# EAGLE board LoRa_1W_Breakout-Panel (EAGLE 9.6.2), part 1 of 2
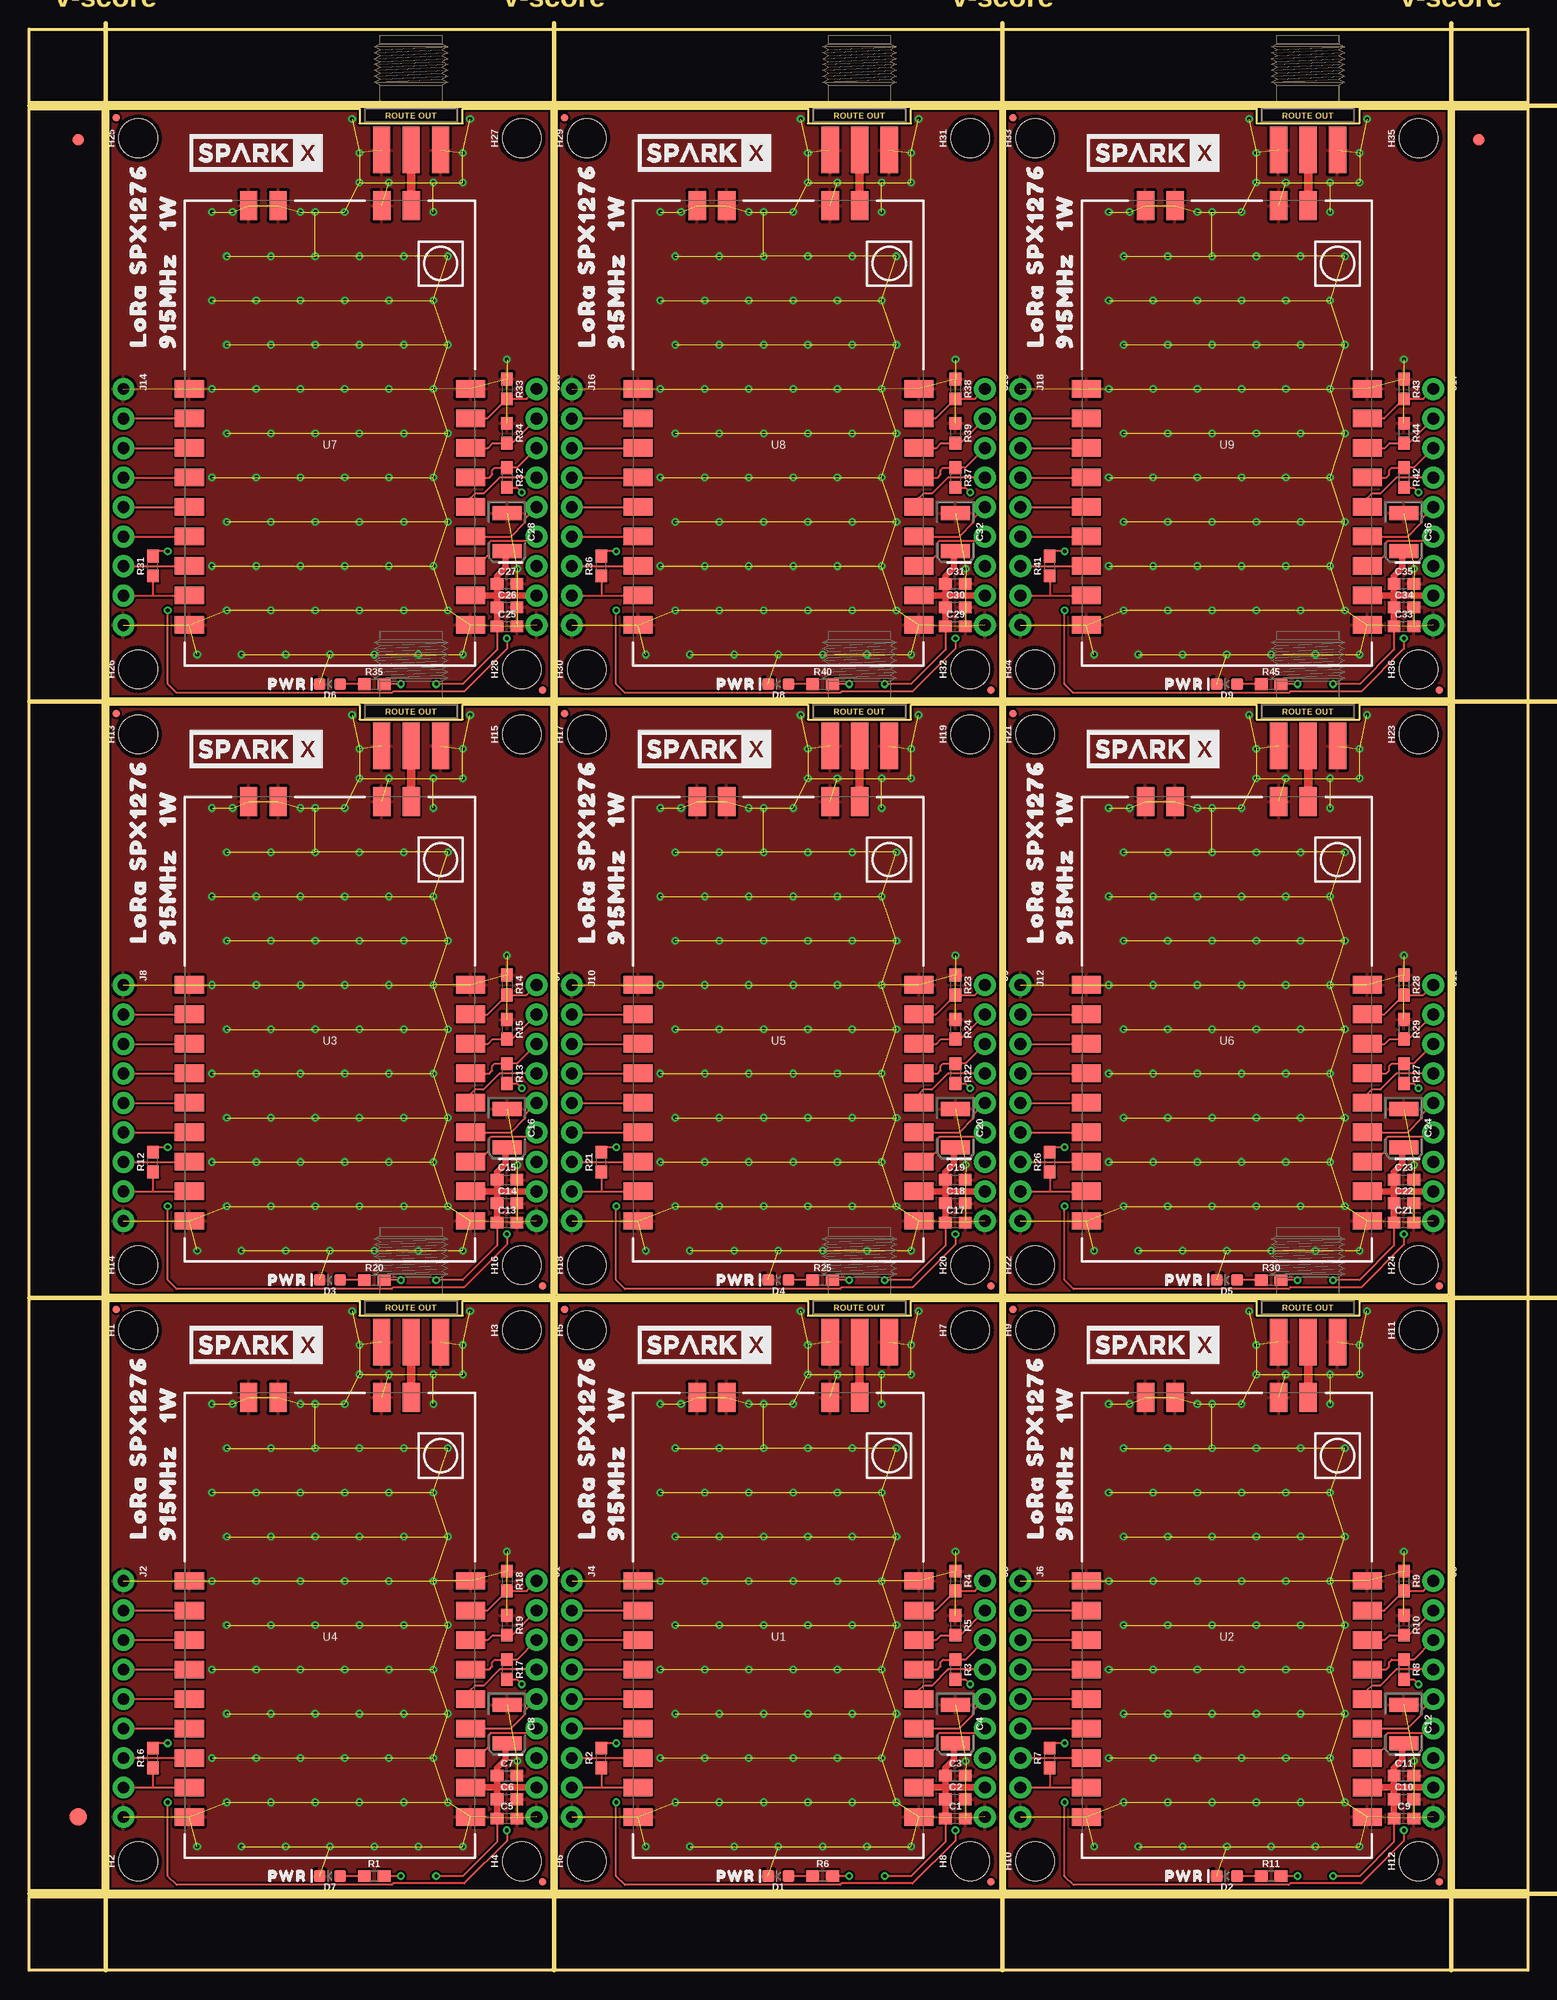
[diagram p0: board, top side]
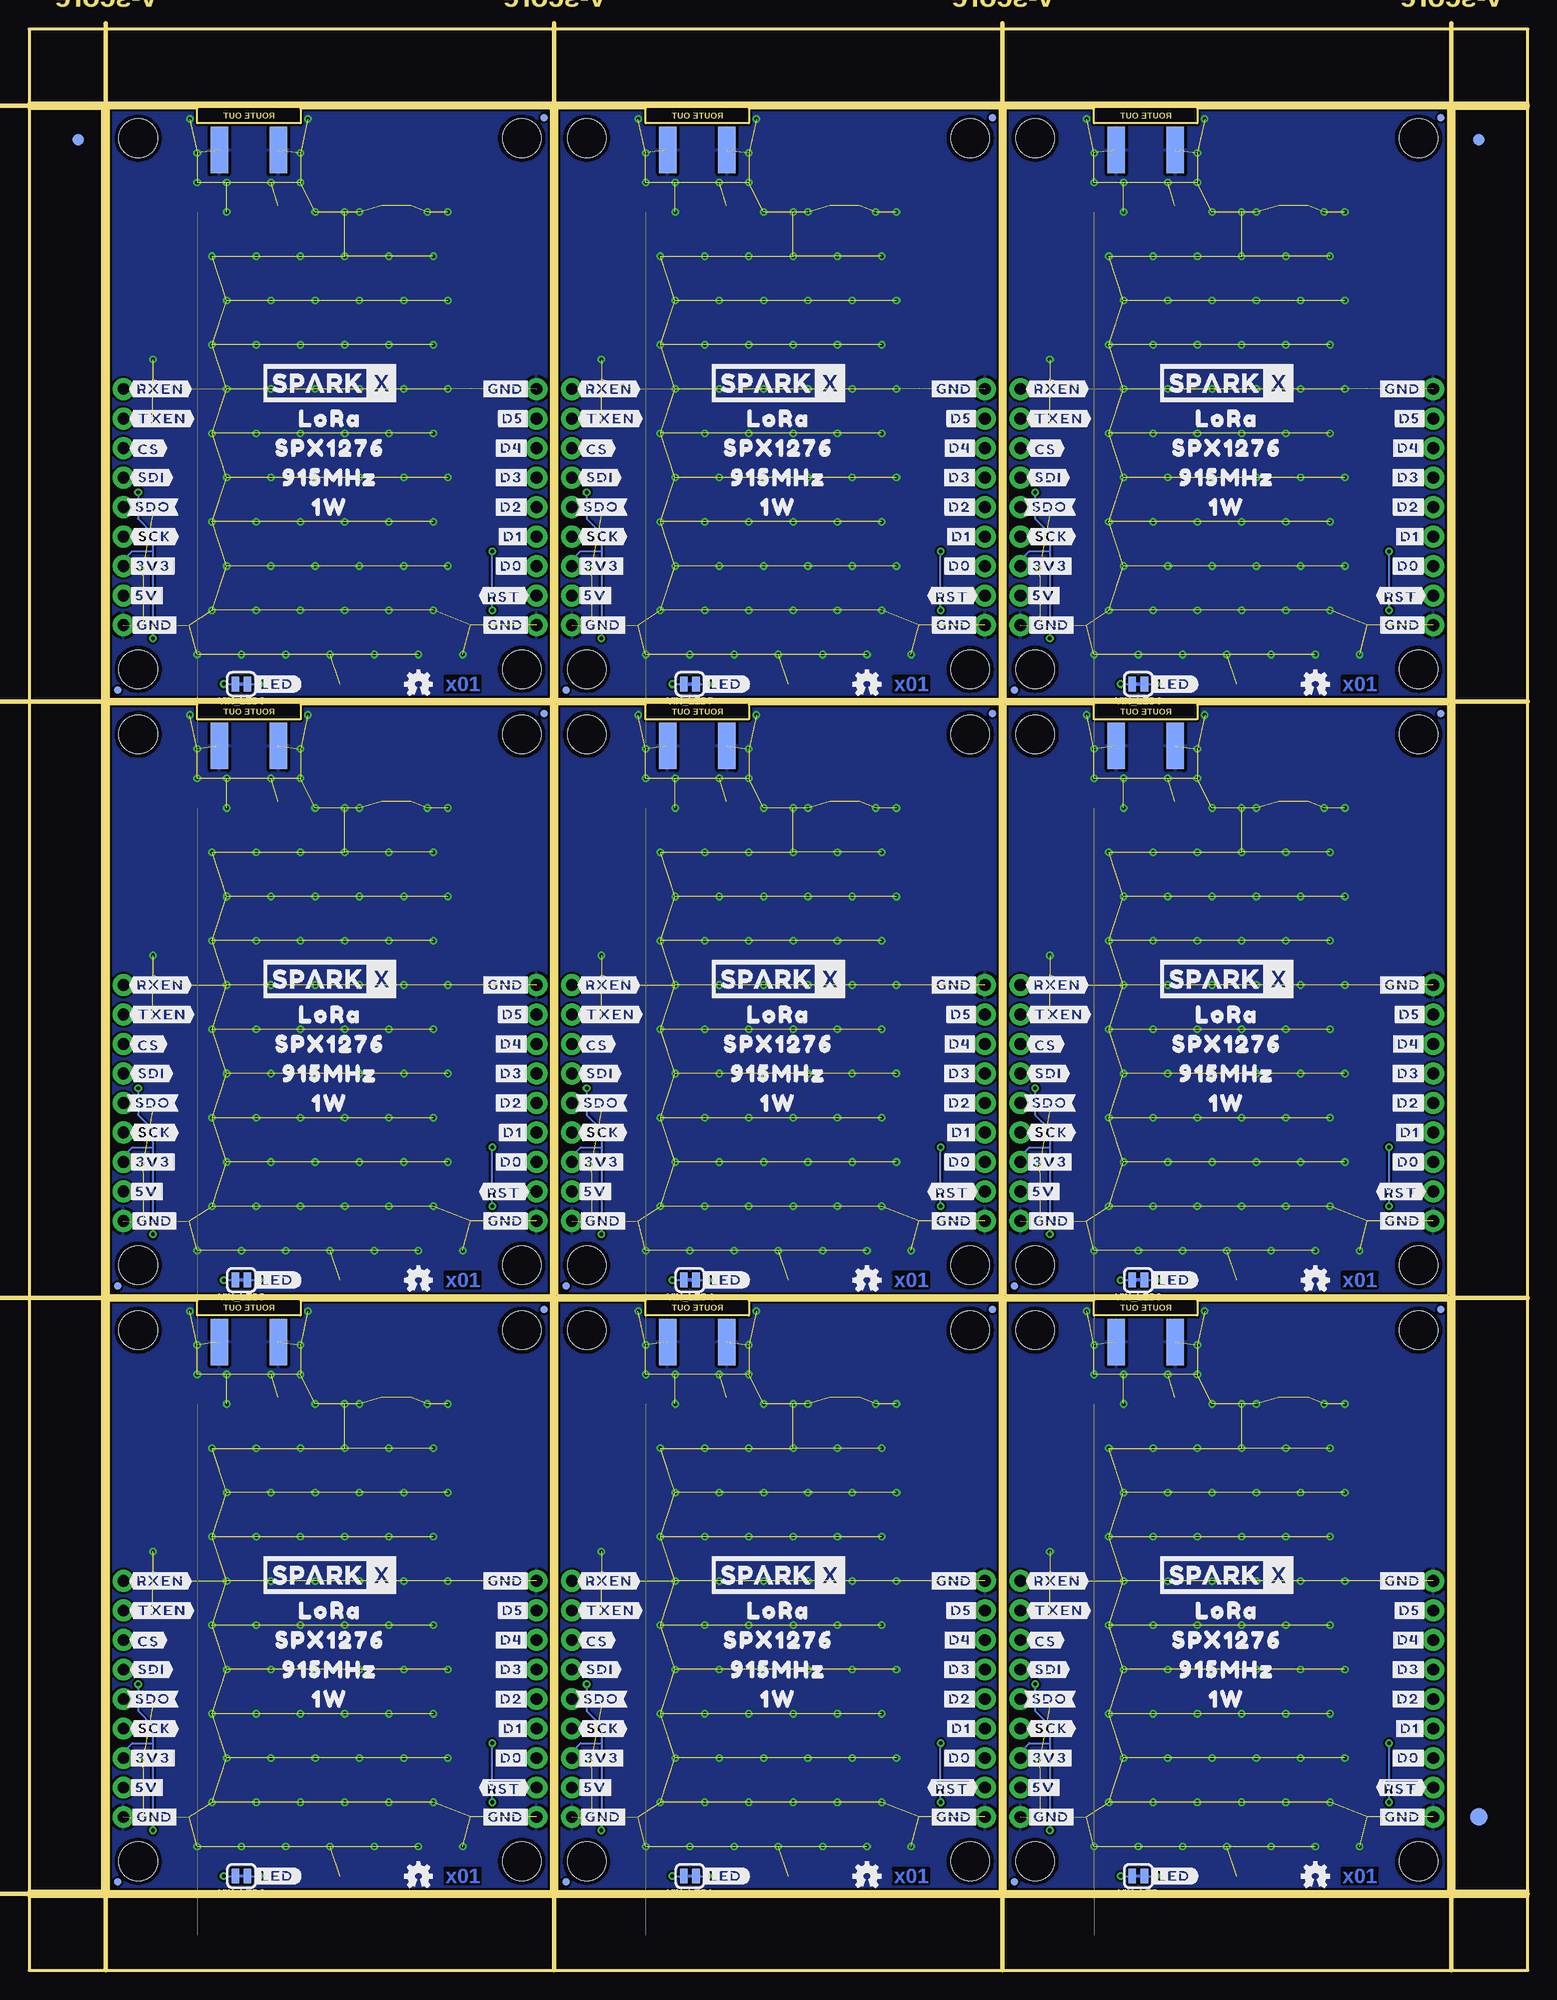
[diagram p1: board, bottom side, seen from below]

Size 129.03 x 167.13 mm. Coordinates in mm from the lower left corner, seen from the top.
Outline: 44.96,6.86 6.86,6.86 6.86,57.66 28.45,57.66 28.45,56.39 37.34,56.39 37.34,57.66 44.96,57.66 44.96,6.86
Outline: 83.57,6.86 45.47,6.86 45.47,57.66 67.06,57.66 67.06,56.39 75.95,56.39 75.95,57.66 83.57,57.66 83.57,6.86
Outline: 122.17,6.86 84.07,6.86 84.07,57.66 105.66,57.66 105.66,56.39 114.55,56.39 114.55,57.66 122.17,57.66 122.17,6.86
Outline: 44.96,58.17 6.86,58.17 6.86,108.97 28.45,108.97 28.45,107.7 37.34,107.7 37.34,108.97 44.96,108.97 44.96,58.17
Outline: 83.57,58.17 45.47,58.17 45.47,108.97 67.06,108.97 67.06,107.7 75.95,107.7 75.95,108.97 83.57,108.97 83.57,58.17
Outline: 122.17,58.17 84.07,58.17 84.07,108.97 105.66,108.97 105.66,107.7 114.55,107.7 114.55,108.97 122.17,108.97 122.17,58.17
Outline: 44.96,109.47 6.86,109.47 6.86,160.27 28.45,160.27 28.45,159 37.34,159 37.34,160.27 44.96,160.27 44.96,109.47
Outline: 83.57,109.47 45.47,109.47 45.47,160.27 67.06,160.27 67.06,159 75.95,159 75.95,160.27 83.57,160.27 83.57,109.47
Outline: 122.17,109.47 84.07,109.47 84.07,160.27 105.66,160.27 105.66,159 114.55,159 114.55,160.27 122.17,160.27 122.17,109.47
Outline: 0,6.35 129.03,6.35 129.03,0 0,0 0,6.35
Outline: 122.68,160.27 129.03,160.27 129.03,6.86 122.68,6.86 122.68,160.27
Outline: 0,167.13 129.03,167.13 129.03,160.78 0,160.78 0,167.13
Outline: 0,160.27 6.35,160.27 6.35,6.86 0,6.86 0,160.27
Copper layers (1*16): Top 0.035mm / dielectric 1.5mm / Bottom 0.035mm
Design rules "LoRa_1W_Breakout": minimum track width 7mil, minimum drill 12mil, track to track 7mil, track to pad 7mil, pad to pad 7mil, via to via 7mil, smd to smd 7mil, copper to edge 7mil, drill to drill 7mil, minimum pad ring 7mil, minimum via ring 7mil, stop-mask expansion 4mil, vias tented up to drill 25mil, thermal gap 10mil
Net classes: 0 default: width 0 mm, drill 0 mm
Milling: 8 lines

## Footprints (pad centres in the part's own frame; a part is rotated, then mirrored left to right if it is on the bottom)
0603 = smd 1.1 x 1: 1 -0.85,0; 2 0.85,0
EIA3528 = smd 1.2 x 2.5: A 1.65,0; C -1.65,0
LED-0603 = smd 1 x 1: A -0.877,0; C 0.877,0
SMA-EDGE = smd 1.5 x 4: GND@0 -2.54,0; GND@1 2.54,0; SIG 0,0 | smd 1.5 x 4 bottom: GND@2 -2.54,0; GND@3 2.54,0
FIDUCIAL-1X2 = smd 1 x 1: 1 0,0
FIDUCIAL-1.5X3 = smd 1.5 x 1.5: 1 0,0
FIDUCIAL-MICRO = smd 0.635 x 0.635: 1 0,0
STAND-OFF = hole 3.302: 0,0
1X09_NO_SILK = drill 1.016 pad 1.88: 1 0,0; 2 2.54,0; 3 5.08,0; 4 7.62,0; 5 10.16,0; 6 12.7,0; 7 15.24,0; 8 17.78,0; 9 20.32,0
E19-915MS1W = smd 2.5 x 1.5: 1 12.1,-3.82; 2 12.1,-1.28; 3 12.1,1.26; 4 12.1,3.8; 5 12.1,6.34; 6 12.1,8.88; 7 12.1,11.42; 8 12.1,13.96; 9 12.1,16.5; 10 -12.1,16.5; 11 -12.1,13.96; 12 -12.1,11.42; 13 -12.1,8.88; 14 -12.1,6.34; 15 -12.1,3.8; 16 -12.1,1.26; 17 -12.1,-1.28; 18 -12.1,-3.82 | smd 1.5 x 2.5: 19 -7,-19.6; 20 -4.46,-19.6; 21 4.46,-19.6; 22 7,-19.6
SMT-JUMPER_2_NC_TRACE_SILK = smd 0.66 x 1.27: 1 -0.521,0; 2 0.521,0

## Placement (x,y rotation side)
C1  1.0uF  [0603]  79.76,13.08 0 top
C2  0.1uF  [0603]  79.76,14.73 0 top
C3  0.22uF  [0603]  79.76,16.76 0 top
C4  68uF  [EIA3528]  79.76,21.21 270 top
C5  1.0uF  [0603]  41.15,13.08 0 top
C6  0.1uF  [0603]  41.15,14.73 0 top
C7  0.22uF  [0603]  41.15,16.76 0 top
C8  68uF  [EIA3528]  41.15,21.21 270 top
C9  1.0uF  [0603]  118.36,13.08 0 top
C10  0.1uF  [0603]  118.36,14.73 0 top
C11  0.22uF  [0603]  118.36,16.76 0 top
C12  68uF  [EIA3528]  118.36,21.21 270 top
C13  1.0uF  [0603]  41.15,64.39 0 top
C14  0.1uF  [0603]  41.15,66.04 0 top
C15  0.22uF  [0603]  41.15,68.07 0 top
C16  68uF  [EIA3528]  41.15,72.52 270 top
C17  1.0uF  [0603]  79.76,64.39 0 top
C18  0.1uF  [0603]  79.76,66.04 0 top
C19  0.22uF  [0603]  79.76,68.07 0 top
C20  68uF  [EIA3528]  79.76,72.52 270 top
C21  1.0uF  [0603]  118.36,64.39 0 top
C22  0.1uF  [0603]  118.36,66.04 0 top
C23  0.22uF  [0603]  118.36,68.07 0 top
C24  68uF  [EIA3528]  118.36,72.52 270 top
C25  1.0uF  [0603]  41.15,115.7 0 top
C26  0.1uF  [0603]  41.15,117.35 0 top
C27  0.22uF  [0603]  41.15,119.38 0 top
C28  68uF  [EIA3528]  41.15,123.83 270 top
C29  1.0uF  [0603]  79.76,115.7 0 top
C30  0.1uF  [0603]  79.76,117.35 0 top
C31  0.22uF  [0603]  79.76,119.38 0 top
C32  68uF  [EIA3528]  79.76,123.83 270 top
C33  1.0uF  [0603]  118.36,115.7 0 top
C34  0.1uF  [0603]  118.36,117.35 0 top
C35  0.22uF  [0603]  118.36,119.38 0 top
C36  68uF  [EIA3528]  118.36,123.83 270 top
D1  Yellow  [LED-0603]  64.52,8.13 180 top
D2  Yellow  [LED-0603]  103.12,8.13 180 top
D3  Yellow  [LED-0603]  25.91,59.44 180 top
D4  Yellow  [LED-0603]  64.52,59.44 180 top
D5  Yellow  [LED-0603]  103.12,59.44 180 top
D6  Yellow  [LED-0603]  25.91,110.74 180 top
D7  Yellow  [LED-0603]  25.91,8.13 180 top
D8  Yellow  [LED-0603]  64.52,110.74 180 top
D9  Yellow  [LED-0603]  103.12,110.74 180 top
E1  RP-SMA  [SMA-EDGE]  32.89,54.1 0 top
E2  RP-SMA  [SMA-EDGE]  71.5,54.1 0 top
E3  RP-SMA  [SMA-EDGE]  110.11,54.1 0 top
E4  RP-SMA  [SMA-EDGE]  32.89,105.41 0 top
E5  RP-SMA  [SMA-EDGE]  71.5,105.41 0 top
E6  RP-SMA  [SMA-EDGE]  110.11,105.41 0 top
E7  RP-SMA  [SMA-EDGE]  32.89,156.72 0 top
E8  RP-SMA  [SMA-EDGE]  71.5,156.72 0 top
E9  RP-SMA  [SMA-EDGE]  110.11,156.72 0 top
E$1  [FIDUCIAL-1X2]  4.23,157.61 0 top
E$2  [FIDUCIAL-1X2]  4.23,157.61 0 bottom
E$3  [FIDUCIAL-1X2]  124.8,157.61 0 top
E$4  [FIDUCIAL-1X2]  124.8,157.61 0 bottom
E$5  [FIDUCIAL-1.5X3]  4.23,13.21 0 top
E$6  [FIDUCIAL-1.5X3]  4.23,13.21 0 bottom
FD1  FIDUCIALUFIDUCIAL  [FIDUCIAL-MICRO]  44.2,7.62 90 top
FD2  FIDUCIALUFIDUCIAL  [FIDUCIAL-MICRO]  7.49,56.9 90 top
FD3  FIDUCIALUFIDUCIAL  [FIDUCIAL-MICRO]  44.2,7.62 270 bottom
FD4  FIDUCIALUFIDUCIAL  [FIDUCIAL-MICRO]  7.49,56.9 270 bottom
FD5  FIDUCIALUFIDUCIAL  [FIDUCIAL-MICRO]  82.8,7.62 90 top
FD6  FIDUCIALUFIDUCIAL  [FIDUCIAL-MICRO]  46.1,56.9 90 top
FD7  FIDUCIALUFIDUCIAL  [FIDUCIAL-MICRO]  82.8,7.62 270 bottom
FD8  FIDUCIALUFIDUCIAL  [FIDUCIAL-MICRO]  46.1,56.9 270 bottom
FD9  FIDUCIALUFIDUCIAL  [FIDUCIAL-MICRO]  121.41,7.62 90 top
FD10  FIDUCIALUFIDUCIAL  [FIDUCIAL-MICRO]  84.71,56.9 90 top
FD11  FIDUCIALUFIDUCIAL  [FIDUCIAL-MICRO]  121.41,7.62 270 bottom
FD12  FIDUCIALUFIDUCIAL  [FIDUCIAL-MICRO]  84.71,56.9 270 bottom
FD13  FIDUCIALUFIDUCIAL  [FIDUCIAL-MICRO]  44.2,58.93 90 top
FD14  FIDUCIALUFIDUCIAL  [FIDUCIAL-MICRO]  7.49,108.2 90 top
FD15  FIDUCIALUFIDUCIAL  [FIDUCIAL-MICRO]  44.2,58.93 270 bottom
FD16  FIDUCIALUFIDUCIAL  [FIDUCIAL-MICRO]  7.49,108.2 270 bottom
FD17  FIDUCIALUFIDUCIAL  [FIDUCIAL-MICRO]  82.8,58.93 90 top
FD18  FIDUCIALUFIDUCIAL  [FIDUCIAL-MICRO]  46.1,108.2 90 top
FD19  FIDUCIALUFIDUCIAL  [FIDUCIAL-MICRO]  82.8,58.93 270 bottom
FD20  FIDUCIALUFIDUCIAL  [FIDUCIAL-MICRO]  46.1,108.2 270 bottom
FD21  FIDUCIALUFIDUCIAL  [FIDUCIAL-MICRO]  121.41,58.93 90 top
FD22  FIDUCIALUFIDUCIAL  [FIDUCIAL-MICRO]  84.71,108.2 90 top
FD23  FIDUCIALUFIDUCIAL  [FIDUCIAL-MICRO]  121.41,58.93 270 bottom
FD24  FIDUCIALUFIDUCIAL  [FIDUCIAL-MICRO]  84.71,108.2 270 bottom
FD25  FIDUCIALUFIDUCIAL  [FIDUCIAL-MICRO]  44.2,110.24 90 top
FD26  FIDUCIALUFIDUCIAL  [FIDUCIAL-MICRO]  7.49,159.51 90 top
FD27  FIDUCIALUFIDUCIAL  [FIDUCIAL-MICRO]  44.2,110.24 270 bottom
FD28  FIDUCIALUFIDUCIAL  [FIDUCIAL-MICRO]  7.49,159.51 270 bottom
FD29  FIDUCIALUFIDUCIAL  [FIDUCIAL-MICRO]  82.8,110.24 90 top
FD30  FIDUCIALUFIDUCIAL  [FIDUCIAL-MICRO]  46.1,159.51 90 top
FD31  FIDUCIALUFIDUCIAL  [FIDUCIAL-MICRO]  82.8,110.24 270 bottom
FD32  FIDUCIALUFIDUCIAL  [FIDUCIAL-MICRO]  46.1,159.51 270 bottom
FD33  FIDUCIALUFIDUCIAL  [FIDUCIAL-MICRO]  121.41,110.24 90 top
FD34  FIDUCIALUFIDUCIAL  [FIDUCIAL-MICRO]  84.71,159.51 90 top
FD35  FIDUCIALUFIDUCIAL  [FIDUCIAL-MICRO]  121.41,110.24 270 bottom
FD36  FIDUCIALUFIDUCIAL  [FIDUCIAL-MICRO]  84.71,159.51 270 bottom
H1  STAND-OFF  [STAND-OFF]  9.4,55.12 90 top
H2  STAND-OFF  [STAND-OFF]  9.4,9.4 90 top
H3  STAND-OFF  [STAND-OFF]  42.42,55.12 90 top
H4  STAND-OFF  [STAND-OFF]  42.42,9.4 90 top
H5  STAND-OFF  [STAND-OFF]  48.01,55.12 90 top
H6  STAND-OFF  [STAND-OFF]  48.01,9.4 90 top
H7  STAND-OFF  [STAND-OFF]  81.03,55.12 90 top
H8  STAND-OFF  [STAND-OFF]  81.03,9.4 90 top
H9  STAND-OFF  [STAND-OFF]  86.61,55.12 90 top
H10  STAND-OFF  [STAND-OFF]  86.61,9.4 90 top
H11  STAND-OFF  [STAND-OFF]  119.63,55.12 90 top
H12  STAND-OFF  [STAND-OFF]  119.63,9.4 90 top
H13  STAND-OFF  [STAND-OFF]  9.4,106.43 90 top
H14  STAND-OFF  [STAND-OFF]  9.4,60.71 90 top
H15  STAND-OFF  [STAND-OFF]  42.42,106.43 90 top
H16  STAND-OFF  [STAND-OFF]  42.42,60.71 90 top
H17  STAND-OFF  [STAND-OFF]  48.01,106.43 90 top
H18  STAND-OFF  [STAND-OFF]  48.01,60.71 90 top
H19  STAND-OFF  [STAND-OFF]  81.03,106.43 90 top
H20  STAND-OFF  [STAND-OFF]  81.03,60.71 90 top
H21  STAND-OFF  [STAND-OFF]  86.61,106.43 90 top
H22  STAND-OFF  [STAND-OFF]  86.61,60.71 90 top
H23  STAND-OFF  [STAND-OFF]  119.63,106.43 90 top
H24  STAND-OFF  [STAND-OFF]  119.63,60.71 90 top
H25  STAND-OFF  [STAND-OFF]  9.4,157.73 90 top
H26  STAND-OFF  [STAND-OFF]  9.4,112.01 90 top
H27  STAND-OFF  [STAND-OFF]  42.42,157.73 90 top
H28  STAND-OFF  [STAND-OFF]  42.42,112.01 90 top
H29  STAND-OFF  [STAND-OFF]  48.01,157.73 90 top
H30  STAND-OFF  [STAND-OFF]  48.01,112.01 90 top
H31  STAND-OFF  [STAND-OFF]  81.03,157.73 90 top
H32  STAND-OFF  [STAND-OFF]  81.03,112.01 90 top
H33  STAND-OFF  [STAND-OFF]  86.61,157.73 90 top
H34  STAND-OFF  [STAND-OFF]  86.61,112.01 90 top
H35  STAND-OFF  [STAND-OFF]  119.63,157.73 90 top
H36  STAND-OFF  [STAND-OFF]  119.63,112.01 90 top
J1  [1X09_NO_SILK]  43.69,33.53 270 top
J2  [1X09_NO_SILK]  8.13,33.53 270 top
J3  [1X09_NO_SILK]  82.3,33.53 270 top
J4  [1X09_NO_SILK]  46.74,33.53 270 top
J5  [1X09_NO_SILK]  120.9,33.53 270 top
J6  [1X09_NO_SILK]  85.34,33.53 270 top
J7  [1X09_NO_SILK]  43.69,84.84 270 top
J8  [1X09_NO_SILK]  8.13,84.84 270 top
J9  [1X09_NO_SILK]  82.3,84.84 270 top
J10  [1X09_NO_SILK]  46.74,84.84 270 top
J11  [1X09_NO_SILK]  120.9,84.84 270 top
J12  [1X09_NO_SILK]  85.34,84.84 270 top
J13  [1X09_NO_SILK]  43.69,136.14 270 top
J14  [1X09_NO_SILK]  8.13,136.14 270 top
J15  [1X09_NO_SILK]  82.3,136.14 270 top
J16  [1X09_NO_SILK]  46.74,136.14 270 top
J17  [1X09_NO_SILK]  120.9,136.14 270 top
J18  [1X09_NO_SILK]  85.34,136.14 270 top
LOGO1  OSHW-LOGOMINI  [OSHW-LOGO-MINI]  56.9,8.13 0 bottom
LOGO2  OSHW-LOGOMINI  [OSHW-LOGO-MINI]  95.5,8.13 0 bottom
LOGO3  OSHW-LOGOMINI  [OSHW-LOGO-MINI]  18.29,8.13 0 bottom
LOGO4  OSHW-LOGOMINI  [OSHW-LOGO-MINI]  18.29,59.44 0 bottom
LOGO5  OSHW-LOGOMINI  [OSHW-LOGO-MINI]  56.9,59.44 0 bottom
LOGO6  OSHW-LOGOMINI  [OSHW-LOGO-MINI]  95.5,59.44 0 bottom
LOGO7  OSHW-LOGOMINI  [OSHW-LOGO-MINI]  18.29,110.74 0 bottom
LOGO8  OSHW-LOGOMINI  [OSHW-LOGO-MINI]  56.9,110.74 0 bottom
LOGO9  OSHW-LOGOMINI  [OSHW-LOGO-MINI]  95.5,110.74 0 bottom
R1  1k  [0603]  29.72,8.13 0 top
R2  100k  [0603]  49.28,18.29 90 top
R3  100k  [0603]  79.76,25.91 270 top
R4  100k  [0603]  79.76,33.53 270 top
R5  100k  [0603]  79.76,29.72 270 top
R6  1k  [0603]  68.33,8.13 0 top
R7  100k  [0603]  87.88,18.29 90 top
R8  100k  [0603]  118.36,25.91 270 top
R9  100k  [0603]  118.36,33.53 270 top
R10  100k  [0603]  118.36,29.72 270 top
R11  1k  [0603]  106.93,8.13 0 top
R12  100k  [0603]  10.67,69.6 90 top
R13  100k  [0603]  41.15,77.22 270 top
R14  100k  [0603]  41.15,84.84 270 top
R15  100k  [0603]  41.15,81.03 270 top
R16  100k  [0603]  10.67,18.29 90 top
R17  100k  [0603]  41.15,25.91 270 top
R18  100k  [0603]  41.15,33.53 270 top
R19  100k  [0603]  41.15,29.72 270 top
R20  1k  [0603]  29.72,59.44 0 top
R21  100k  [0603]  49.28,69.6 90 top
R22  100k  [0603]  79.76,77.22 270 top
R23  100k  [0603]  79.76,84.84 270 top
R24  100k  [0603]  79.76,81.03 270 top
R25  1k  [0603]  68.33,59.44 0 top
R26  100k  [0603]  87.88,69.6 90 top
R27  100k  [0603]  118.36,77.22 270 top
R28  100k  [0603]  118.36,84.84 270 top
R29  100k  [0603]  118.36,81.03 270 top
R30  1k  [0603]  106.93,59.44 0 top
R31  100k  [0603]  10.67,120.9 90 top
R32  100k  [0603]  41.15,128.52 270 top
R33  100k  [0603]  41.15,136.14 270 top
R34  100k  [0603]  41.15,132.33 270 top
R35  1k  [0603]  29.72,110.74 0 top
R36  100k  [0603]  49.28,120.9 90 top
R37  100k  [0603]  79.76,128.52 270 top
R38  100k  [0603]  79.76,136.14 270 top
R39  100k  [0603]  79.76,132.33 270 top
R40  1k  [0603]  68.33,110.74 0 top
R41  100k  [0603]  87.88,120.9 90 top
R42  100k  [0603]  118.36,128.52 270 top
R43  100k  [0603]  118.36,136.14 270 top
R44  100k  [0603]  118.36,132.33 270 top
R45  1k  [0603]  106.93,110.74 0 top
U1  E19-915M30S  [E19-915MS1W]  64.52,29.72 180 top
U2  E19-915M30S  [E19-915MS1W]  103.12,29.72 180 top
U3  E19-915M30S  [E19-915MS1W]  25.91,81.03 180 top
U4  E19-915M30S  [E19-915MS1W]  25.91,29.72 180 top
U5  E19-915M30S  [E19-915MS1W]  64.52,81.03 180 top
U6  E19-915M30S  [E19-915MS1W]  103.12,81.03 180 top
U7  E19-915M30S  [E19-915MS1W]  25.91,132.33 180 top
U8  E19-915M30S  [E19-915MS1W]  64.52,132.33 180 top
U9  E19-915M30S  [E19-915MS1W]  103.12,132.33 180 top
U$1  [LORA0]  25.91,30.99 0 bottom
U$2  [SPX12760]  25.91,28.45 0 bottom
U$3  [1W1]  25.91,23.37 0 bottom
U$4  [PWR0]  22.23,8.13 0 top
U$5  SPARKX-LOGO5  [SPARKX-LARGE]  19.56,53.85 0 top
U$6  SPARKX-LOGO5  [SPARKX-LARGE]  25.91,34.04 0 bottom
U$7  [915MHZ0]  11.94,41.15 90 top
U$8  [915MHZ0]  25.91,25.91 0 bottom
U$9  [PWR0]  60.83,8.13 0 top
U$10  [#LED#0]  69.09,8.13 0 bottom
U$11  [#5V#1]  80.26,15.75 0 bottom
U$12  [#3V3#0]  79.76,18.29 0 bottom
U$13  [#SDO#3]  79.76,23.37 0 bottom
U$14  [#SDI#4]  79.88,25.91 0 bottom
U$15  [#LED#0]  30.48,8.13 0 bottom
U$16  [##CS##5]  80.14,28.45 0 bottom
U$17  [#TXEN#6]  78.99,30.99 0 bottom
U$18  [#RXEN#7]  79.12,33.53 0 bottom
U$19  [#GND#8]  79.63,13.21 0 bottom
U$20  [#GND#8]  49.4,33.53 0 bottom
U$21  [#D5#6]  48.77,30.99 0 bottom
U$22  [#D4#5]  48.89,28.45 0 bottom
U$23  [#D3#4]  48.89,25.91 0 bottom
U$24  [#D2#3]  48.89,23.37 0 bottom
U$25  [#D1#2]  48.77,20.83 0 bottom
U$26  [#D0#1]  48.89,18.29 0 bottom
U$27  [1W1]  11.94,48.77 90 top
U$28  [##RST##0]  49.53,15.75 0 bottom
U$29  [#GND#8]  49.4,13.21 0 bottom
U$30  [#SCK#2]  79.63,20.83 0 bottom
U$31  [1W1]  50.55,48.77 90 top
U$32  [LORA0]  48.01,39.88 90 top
U$33  [SPX12760]  48.01,48.13 90 top
U$34  [LORA0]  64.52,30.99 0 bottom
U$35  [SPX12760]  64.52,28.45 0 bottom
U$36  [1W1]  64.52,23.37 0 bottom
U$37  SPARKX-LOGO5  [SPARKX-LARGE]  58.17,53.85 0 top
U$38  SPARKX-LOGO5  [SPARKX-LARGE]  64.52,34.04 0 bottom
U$39  [915MHZ0]  50.55,41.15 90 top
U$40  [915MHZ0]  64.52,25.91 0 bottom
U$41  [PWR0]  99.44,8.13 0 top
U$42  [#LED#0]  107.7,8.13 0 bottom
U$43  [#5V#1]  41.66,15.75 0 bottom
U$44  [#3V3#0]  41.15,18.29 0 bottom
U$45  [#SDO#3]  41.15,23.37 0 bottom
U$46  [#SDI#4]  41.27,25.91 0 bottom
U$47  [##CS##5]  41.53,28.45 0 bottom
U$48  [#TXEN#6]  40.39,30.99 0 bottom
U$49  [#RXEN#7]  40.51,33.53 0 bottom
U$50  [#5V#1]  118.87,15.75 0 bottom
U$51  [#3V3#0]  118.36,18.29 0 bottom
U$52  [#GND#8]  41.02,13.21 0 bottom
U$53  [#GND#8]  10.79,33.53 0 bottom
U$54  [#D5#6]  10.16,30.99 0 bottom
U$55  [#D4#5]  10.29,28.45 0 bottom
U$56  [#D3#4]  10.29,25.91 0 bottom
U$57  [#D2#3]  10.29,23.37 0 bottom
U$58  [#D1#2]  10.16,20.83 0 bottom
U$59  [#D0#1]  10.29,18.29 0 bottom
U$60  [##RST##0]  10.92,15.75 0 bottom
U$61  [#GND#8]  10.79,13.21 0 bottom
U$62  [#SCK#2]  41.02,20.83 0 bottom
U$63  [#SDO#3]  118.36,23.37 0 bottom
U$64  [#SDI#4]  118.49,25.91 0 bottom
U$65  [##CS##5]  118.75,28.45 0 bottom
U$66  [#TXEN#6]  117.6,30.99 0 bottom
U$67  [LORA0]  9.4,39.88 90 top
U$68  [#RXEN#7]  117.73,33.53 0 bottom
U$69  [SPX12760]  9.4,48.13 90 top
U$70  [#GND#8]  118.24,13.21 0 bottom
U$71  [#GND#8]  88.01,33.53 0 bottom
U$72  [#D5#6]  87.38,30.99 0 bottom
U$73  [#D4#5]  87.5,28.45 0 bottom
U$74  [#D3#4]  87.5,25.91 0 bottom
U$75  [#D2#3]  87.5,23.37 0 bottom
U$76  [#D1#2]  87.38,20.83 0 bottom
U$77  [#D0#1]  87.5,18.29 0 bottom
U$78  [##RST##0]  88.14,15.75 0 bottom
U$79  [#GND#8]  88.01,13.21 0 bottom
U$80  [#SCK#2]  118.24,20.83 0 bottom
U$81  [1W1]  89.15,48.77 90 top
U$82  [LORA0]  86.61,39.88 90 top
U$83  [SPX12760]  86.61,48.13 90 top
U$84  [LORA0]  103.12,30.99 0 bottom
U$85  [SPX12760]  103.12,28.45 0 bottom
U$86  [1W1]  103.12,23.37 0 bottom
U$87  SPARKX-LOGO5  [SPARKX-LARGE]  96.77,53.85 0 top
U$88  SPARKX-LOGO5  [SPARKX-LARGE]  103.12,34.04 0 bottom
U$89  [915MHZ0]  89.15,41.15 90 top
U$90  [915MHZ0]  103.12,25.91 0 bottom
U$91  [PWR0]  22.23,59.44 0 top
U$92  [#LED#0]  30.48,59.44 0 bottom
U$93  [#5V#1]  41.66,67.06 0 bottom
U$94  [#3V3#0]  41.15,69.6 0 bottom
U$95  [#SDO#3]  41.15,74.68 0 bottom
U$96  [#SDI#4]  41.27,77.22 0 bottom
U$97  [##CS##5]  41.53,79.76 0 bottom
U$98  [#TXEN#6]  40.39,82.3 0 bottom
U$99  [#RXEN#7]  40.51,84.84 0 bottom
U$100  [#GND#8]  41.02,64.52 0 bottom
U$101  [#GND#8]  10.79,84.84 0 bottom
U$102  [#D5#6]  10.16,82.3 0 bottom
U$103  [#D4#5]  10.29,79.76 0 bottom
U$104  [#D3#4]  10.29,77.22 0 bottom
U$105  [#D2#3]  10.29,74.68 0 bottom
U$106  [#D1#2]  10.16,72.14 0 bottom
U$107  [#D0#1]  10.29,69.6 0 bottom
U$108  [##RST##0]  10.92,67.06 0 bottom
U$109  [#GND#8]  10.79,64.52 0 bottom
U$110  [#SCK#2]  41.02,72.14 0 bottom
U$111  [1W1]  11.94,100.08 90 top
U$112  [LORA0]  9.4,91.19 90 top
U$113  [SPX12760]  9.4,99.44 90 top
U$114  [LORA0]  25.91,82.3 0 bottom
U$115  [SPX12760]  25.91,79.76 0 bottom
U$116  [1W1]  25.91,74.68 0 bottom
U$117  SPARKX-LOGO5  [SPARKX-LARGE]  19.56,105.16 0 top
U$118  SPARKX-LOGO5  [SPARKX-LARGE]  25.91,85.34 0 bottom
U$119  [915MHZ0]  11.94,92.46 90 top
U$120  [915MHZ0]  25.91,77.22 0 bottom
U$121  [PWR0]  60.83,59.44 0 top
U$122  [#LED#0]  69.09,59.44 0 bottom
U$123  [#5V#1]  80.26,67.06 0 bottom
U$124  [#3V3#0]  79.76,69.6 0 bottom
U$125  [#SDO#3]  79.76,74.68 0 bottom
U$126  [#SDI#4]  79.88,77.22 0 bottom
U$127  [##CS##5]  80.14,79.76 0 bottom
U$128  [#TXEN#6]  78.99,82.3 0 bottom
U$129  [#RXEN#7]  79.12,84.84 0 bottom
U$130  [#GND#8]  79.63,64.52 0 bottom
U$131  [#GND#8]  49.4,84.84 0 bottom
U$132  [#D5#6]  48.77,82.3 0 bottom
U$133  [#D4#5]  48.89,79.76 0 bottom
U$134  [#D3#4]  48.89,77.22 0 bottom
U$135  [#D2#3]  48.89,74.68 0 bottom
U$136  [#D1#2]  48.77,72.14 0 bottom
U$137  [#D0#1]  48.89,69.6 0 bottom
U$138  [##RST##0]  49.53,67.06 0 bottom
U$139  [#GND#8]  49.4,64.52 0 bottom
U$140  [#SCK#2]  79.63,72.14 0 bottom
U$141  [1W1]  50.55,100.08 90 top
U$142  [LORA0]  48.01,91.19 90 top
U$143  [SPX12760]  48.01,99.44 90 top
U$144  [LORA0]  64.52,82.3 0 bottom
U$145  [SPX12760]  64.52,79.76 0 bottom
U$146  [1W1]  64.52,74.68 0 bottom
U$147  SPARKX-LOGO5  [SPARKX-LARGE]  58.17,105.16 0 top
U$148  SPARKX-LOGO5  [SPARKX-LARGE]  64.52,85.34 0 bottom
U$149  [915MHZ0]  50.55,92.46 90 top
U$150  [915MHZ0]  64.52,77.22 0 bottom
U$151  [PWR0]  99.44,59.44 0 top
U$152  [#LED#0]  107.7,59.44 0 bottom
U$153  [#5V#1]  118.87,67.06 0 bottom
U$154  [#3V3#0]  118.36,69.6 0 bottom
U$155  [#SDO#3]  118.36,74.68 0 bottom
U$156  [#SDI#4]  118.49,77.22 0 bottom
U$157  [##CS##5]  118.75,79.76 0 bottom
U$158  [#TXEN#6]  117.6,82.3 0 bottom
U$159  [#RXEN#7]  117.73,84.84 0 bottom
U$160  [#GND#8]  118.24,64.52 0 bottom
U$161  [#GND#8]  88.01,84.84 0 bottom
U$162  [#D5#6]  87.38,82.3 0 bottom
U$163  [#D4#5]  87.5,79.76 0 bottom
U$164  [#D3#4]  87.5,77.22 0 bottom
U$165  [#D2#3]  87.5,74.68 0 bottom
U$166  [#D1#2]  87.38,72.14 0 bottom
U$167  [#D0#1]  87.5,69.6 0 bottom
U$168  [##RST##0]  88.14,67.06 0 bottom
U$169  [#GND#8]  88.01,64.52 0 bottom
U$170  [#SCK#2]  118.24,72.14 0 bottom
U$171  [1W1]  89.15,100.08 90 top
U$172  [LORA0]  86.61,91.19 90 top
U$173  [SPX12760]  86.61,99.44 90 top
U$174  [LORA0]  103.12,82.3 0 bottom
U$175  [SPX12760]  103.12,79.76 0 bottom
U$176  [1W1]  103.12,74.68 0 bottom
U$177  SPARKX-LOGO5  [SPARKX-LARGE]  96.77,105.16 0 top
U$178  SPARKX-LOGO5  [SPARKX-LARGE]  103.12,85.34 0 bottom
U$179  [915MHZ0]  89.15,92.46 90 top
U$180  [915MHZ0]  103.12,77.22 0 bottom
U$181  [PWR0]  22.23,110.74 0 top
U$182  [#LED#0]  30.48,110.74 0 bottom
U$183  [#5V#1]  41.66,118.36 0 bottom
U$184  [#3V3#0]  41.15,120.9 0 bottom
U$185  [#SDO#3]  41.15,125.98 0 bottom
U$186  [#SDI#4]  41.27,128.52 0 bottom
U$187  [##CS##5]  41.53,131.06 0 bottom
U$188  [#TXEN#6]  40.39,133.6 0 bottom
U$189  [#RXEN#7]  40.51,136.14 0 bottom
U$190  [#GND#8]  41.02,115.82 0 bottom
U$191  [#GND#8]  10.79,136.14 0 bottom
U$192  [#D5#6]  10.16,133.6 0 bottom
U$193  [#D4#5]  10.29,131.06 0 bottom
U$194  [#D3#4]  10.29,128.52 0 bottom
U$195  [#D2#3]  10.29,125.98 0 bottom
U$196  [#D1#2]  10.16,123.44 0 bottom
U$197  [#D0#1]  10.29,120.9 0 bottom
U$198  [##RST##0]  10.92,118.36 0 bottom
U$199  [#GND#8]  10.79,115.82 0 bottom
U$200  [#SCK#2]  41.02,123.44 0 bottom
U$201  [1W1]  11.94,151.38 90 top
U$202  [LORA0]  9.4,142.49 90 top
U$203  [SPX12760]  9.4,150.75 90 top
U$204  [LORA0]  25.91,133.6 0 bottom
U$205  [SPX12760]  25.91,131.06 0 bottom
U$206  [1W1]  25.91,125.98 0 bottom
U$207  SPARKX-LOGO5  [SPARKX-LARGE]  19.56,156.46 0 top
U$208  SPARKX-LOGO5  [SPARKX-LARGE]  25.91,136.65 0 bottom
U$209  [915MHZ0]  11.94,143.76 90 top
U$210  [915MHZ0]  25.91,128.52 0 bottom
U$211  [PWR0]  60.83,110.74 0 top
U$212  [#LED#0]  69.09,110.74 0 bottom
U$213  [#5V#1]  80.26,118.36 0 bottom
U$214  [#3V3#0]  79.76,120.9 0 bottom
U$215  [#SDO#3]  79.76,125.98 0 bottom
U$216  [#SDI#4]  79.88,128.52 0 bottom
U$217  [##CS##5]  80.14,131.06 0 bottom
U$218  [#TXEN#6]  78.99,133.6 0 bottom
U$219  [#RXEN#7]  79.12,136.14 0 bottom
U$220  [#GND#8]  79.63,115.82 0 bottom
U$221  [#GND#8]  49.4,136.14 0 bottom
U$222  [#D5#6]  48.77,133.6 0 bottom
U$223  [#D4#5]  48.89,131.06 0 bottom
U$224  [#D3#4]  48.89,128.52 0 bottom
U$225  [#D2#3]  48.89,125.98 0 bottom
U$226  [#D1#2]  48.77,123.44 0 bottom
U$227  [#D0#1]  48.89,120.9 0 bottom
U$228  [##RST##0]  49.53,118.36 0 bottom
U$229  [#GND#8]  49.4,115.82 0 bottom
U$230  [#SCK#2]  79.63,123.44 0 bottom
U$231  [1W1]  50.55,151.38 90 top
U$232  [LORA0]  48.01,142.49 90 top
U$233  [SPX12760]  48.01,150.75 90 top
U$234  [LORA0]  64.52,133.6 0 bottom
U$235  [SPX12760]  64.52,131.06 0 bottom
U$236  [1W1]  64.52,125.98 0 bottom
U$237  SPARKX-LOGO5  [SPARKX-LARGE]  58.17,156.46 0 top
U$238  SPARKX-LOGO5  [SPARKX-LARGE]  64.52,136.65 0 bottom
U$239  [915MHZ0]  50.55,143.76 90 top
U$240  [915MHZ0]  64.52,128.52 0 bottom
U$241  [PWR0]  99.44,110.74 0 top
U$242  [#LED#0]  107.7,110.74 0 bottom
U$243  [#5V#1]  118.87,118.36 0 bottom
U$244  [#3V3#0]  118.36,120.9 0 bottom
U$245  [#SDO#3]  118.36,125.98 0 bottom
U$246  [#SDI#4]  118.49,128.52 0 bottom
U$247  [##CS##5]  118.75,131.06 0 bottom
U$248  [#TXEN#6]  117.6,133.6 0 bottom
U$249  [#RXEN#7]  117.73,136.14 0 bottom
U$250  [#GND#8]  118.24,115.82 0 bottom
U$251  [#GND#8]  88.01,136.14 0 bottom
U$252  [#D5#6]  87.38,133.6 0 bottom
U$253  [#D4#5]  87.5,131.06 0 bottom
U$254  [#D3#4]  87.5,128.52 0 bottom
U$255  [#D2#3]  87.5,125.98 0 bottom
U$256  [#D1#2]  87.38,123.44 0 bottom
U$257  [#D0#1]  87.5,120.9 0 bottom
U$258  [##RST##0]  88.14,118.36 0 bottom
U$259  [#GND#8]  88.01,115.82 0 bottom
U$260  [#SCK#2]  118.24,123.44 0 bottom
U$261  [1W1]  89.15,151.38 90 top
U$262  [LORA0]  86.61,142.49 90 top
U$263  [SPX12760]  86.61,150.75 90 top
U$264  [LORA0]  103.12,133.6 0 bottom
U$265  [SPX12760]  103.12,131.06 0 bottom
U$266  [1W1]  103.12,125.98 0 bottom
U$267  SPARKX-LOGO5  [SPARKX-LARGE]  96.77,156.46 0 top
U$268  SPARKX-LOGO5  [SPARKX-LARGE]  103.12,136.65 0 bottom
U$269  [915MHZ0]  89.15,143.76 90 top
U$270  [915MHZ0]  103.12,128.52 0 bottom
VIN_LED  [SMT-JUMPER_2_NC_TRACE_SILK]  33.53,8.13 180 bottom
VIN_LED1  [SMT-JUMPER_2_NC_TRACE_SILK]  72.14,8.13 180 bottom
VIN_LED2  [SMT-JUMPER_2_NC_TRACE_SILK]  110.74,8.13 180 bottom
VIN_LED3  [SMT-JUMPER_2_NC_TRACE_SILK]  33.53,59.44 180 bottom
VIN_LED4  [SMT-JUMPER_2_NC_TRACE_SILK]  72.14,59.44 180 bottom
VIN_LED5  [SMT-JUMPER_2_NC_TRACE_SILK]  110.74,59.44 180 bottom
VIN_LED6  [SMT-JUMPER_2_NC_TRACE_SILK]  33.53,110.74 180 bottom
VIN_LED7  [SMT-JUMPER_2_NC_TRACE_SILK]  72.14,110.74 180 bottom
VIN_LED8  [SMT-JUMPER_2_NC_TRACE_SILK]  110.74,110.74 180 bottom

## Library data of the parts
C1 C5 C9 C13 C17 C21 C25 C29 C33 = SparkFun-Capacitors; PROD_ID: CAP-00868
C2 C6 C10 C14 C18 C22 C26 C30 C34 = SparkFun-Capacitors; PROD_ID: CAP-00810
C3 C7 C11 C15 C19 C23 C27 C31 C35 = SparkFun-Capacitors; PROD_ID: CAP-07822
C4 C8 C12 C16 C20 C24 C28 C32 C36 = SparkFun-Capacitors; PROD_ID: CAP-10790
D1-D9 = SparkFun-LED; PROD_ID: DIO-09003
E1-E9 = SparkFun-RF; PROD_ID: CONN-00827
E$1-E$4 FD1-FD36 LOGO1-LOGO9 = SparkFun-Aesthetics
E$5 E$6 = SparkFun-Retired
H1-H36 = SparkFun-Hardware
J1-J18 = SparkFun-Connectors
R1 R6 R11 R20 R25 R30 R35 R40 R45 = SparkFun-Resistors; PROD_ID: RES-07856
R2-R5 R7-R10 R12-R19 R21-R24 R26-R29 R31-R34 R36-R39 R41-R44 = SparkFun-Resistors; PROD_ID: RES-07828
U1-U9 = SparkFun-RF; PROD_ID: IC-14076
U$1-U$4 U$7-U$36 U$39-U$86 U$89-U$116 U$119-U$146 U$149-U$176 U$179-U$206 U$209-U$236 U$239-U$266 U$269 U$270 = output
U$5 U$6 U$37 U$38 U$87 U$88 U$117 U$118 U$147 U$148 U$177 U$178 U$207 U$208 U$237 U$238 U$267 U$268 = SparkX
VIN_LED VIN_LED1-VIN_LED8 = SparkFun-Jumpers

## Nets
3.3V: J1.7 R16.2 R17.2
3.3V1: J3.7 R2.2 R3.2
3.3V2: J5.7 R7.2 R8.2
3.3V3: J7.7 R12.2 R13.2
3.3V4: J9.7 R21.2 R22.2
3.3V5: J11.7 R26.2 R27.2
3.3V6: J13.7 R31.2 R32.2
3.3V7: J15.7 R36.2 R37.2
3.3V8: J17.7 R41.2 R42.2
5V: C5.1 C6.1 C7.1 C8.A J1.8 U4.11 VIN_LED.2
5V1: C1.1 C2.1 C3.1 C4.A J3.8 U1.11 VIN_LED1.2
5V2: C9.1 C10.1 C11.1 C12.A J5.8 U2.11 VIN_LED2.2
5V3: C13.1 C14.1 C15.1 C16.A J7.8 U3.11 VIN_LED3.2
5V4: C17.1 C18.1 C19.1 C20.A J9.8 U5.11 VIN_LED4.2
5V5: C21.1 C22.1 C23.1 C24.A J11.8 U6.11 VIN_LED5.2
5V6: C25.1 C26.1 C27.1 C28.A J13.8 U7.11 VIN_LED6.2
5V7: C29.1 C30.1 C31.1 C32.A J15.8 U8.11 VIN_LED7.2
5V8: C33.1 C34.1 C35.1 C36.A J17.8 U9.11 VIN_LED8.2
GND: C5.2 C6.2 C7.2 C8.C D7.C E1.GND@0 E1.GND@1 E1.GND@2 E1.GND@3 J1.9 J2.1 J2.9 R18.1 R19.1 U4.1 U4.9 U4.10 U4.18 U4.20 U4.21 U4.22
GND1: C1.2 C2.2 C3.2 C4.C D1.C E2.GND@0 E2.GND@1 E2.GND@2 E2.GND@3 J3.9 J4.1 J4.9 R4.1 R5.1 U1.1 U1.9 U1.10 U1.18 U1.20 U1.21 U1.22
GND2: C9.2 C10.2 C11.2 C12.C D2.C E3.GND@0 E3.GND@1 E3.GND@2 E3.GND@3 J5.9 J6.1 J6.9 R9.1 R10.1 U2.1 U2.9 U2.10 U2.18 U2.20 U2.21 U2.22
GND3: C13.2 C14.2 C15.2 C16.C D3.C E4.GND@0 E4.GND@1 E4.GND@2 E4.GND@3 J7.9 J8.1 J8.9 R14.1 R15.1 U3.1 U3.9 U3.10 U3.18 U3.20 U3.21 U3.22
GND4: C17.2 C18.2 C19.2 C20.C D4.C E5.GND@0 E5.GND@1 E5.GND@2 E5.GND@3 J9.9 J10.1 J10.9 R23.1 R24.1 U5.1 U5.9 U5.10 U5.18 U5.20 U5.21 U5.22
GND5: C21.2 C22.2 C23.2 C24.C D5.C E6.GND@0 E6.GND@1 E6.GND@2 E6.GND@3 J11.9 J12.1 J12.9 R28.1 R29.1 U6.1 U6.9 U6.10 U6.18 U6.20 U6.21 U6.22
GND6: C25.2 C26.2 C27.2 C28.C D6.C E7.GND@0 E7.GND@1 E7.GND@2 E7.GND@3 J13.9 J14.1 J14.9 R33.1 R34.1 U7.1 U7.9 U7.10 U7.18 U7.20 U7.21 U7.22
GND7: C29.2 C30.2 C31.2 C32.C D8.C E8.GND@0 E8.GND@1 E8.GND@2 E8.GND@3 J15.9 J16.1 J16.9 R38.1 R39.1 U8.1 U8.9 U8.10 U8.18 U8.20 U8.21 U8.22
GND8: C33.2 C34.2 C35.2 C36.C D9.C E9.GND@0 E9.GND@1 E9.GND@2 E9.GND@3 J17.9 J18.1 J18.9 R43.1 R44.1 U9.1 U9.9 U9.10 U9.18 U9.20 U9.21 U9.22
LORA_!CS!: J1.3 R17.1 U4.15
LORA_!CS!1: J3.3 R3.1 U1.15
LORA_!CS!2: J5.3 R8.1 U2.15
LORA_!CS!3: J7.3 R13.1 U3.15
LORA_!CS!4: J9.3 R22.1 U5.15
LORA_!CS!5: J11.3 R27.1 U6.15
LORA_!CS!6: J13.3 R32.1 U7.15
LORA_!CS!7: J15.3 R37.1 U8.15
LORA_!CS!8: J17.3 R42.1 U9.15
LORA_!RST!: J2.8 R16.1 U4.8
LORA_!RST!1: J4.8 R2.1 U1.8
LORA_!RST!2: J6.8 R7.1 U2.8
LORA_!RST!3: J8.8 R12.1 U3.8
LORA_!RST!4: J10.8 R21.1 U5.8
LORA_!RST!5: J12.8 R26.1 U6.8
LORA_!RST!6: J14.8 R31.1 U7.8
LORA_!RST!7: J16.8 R36.1 U8.8
LORA_!RST!8: J18.8 R41.1 U9.8
LORA_CIPO: J1.5 U4.13
LORA_CIPO1: J3.5 U1.13
LORA_CIPO2: J5.5 U2.13
LORA_CIPO3: J7.5 U3.13
LORA_CIPO4: J9.5 U5.13
LORA_CIPO5: J11.5 U6.13
LORA_CIPO6: J13.5 U7.13
LORA_CIPO7: J15.5 U8.13
LORA_CIPO8: J17.5 U9.13
LORA_COPI: J1.4 U4.14
LORA_COPI1: J3.4 U1.14
LORA_COPI2: J5.4 U2.14
LORA_COPI3: J7.4 U3.14
LORA_COPI4: J9.4 U5.14
LORA_COPI5: J11.4 U6.14
LORA_COPI6: J13.4 U7.14
LORA_COPI7: J15.4 U8.14
LORA_COPI8: J17.4 U9.14
LORA_D0: J2.7 U4.7
LORA_D1: J2.6 U4.6
LORA_D2: J2.5 U4.5
LORA_D3: J2.4 U4.4
LORA_D4: J2.3 U4.3
LORA_D5: J2.2 U4.2
LORA_D6: J4.7 U1.7
LORA_D7: J4.6 U1.6
LORA_D8: J4.5 U1.5
LORA_D9: J4.4 U1.4
LORA_D10: J4.3 U1.3
LORA_D11: J4.2 U1.2
LORA_D12: J6.7 U2.7
LORA_D13: J6.6 U2.6
LORA_D14: J6.5 U2.5
LORA_D15: J6.4 U2.4
LORA_D16: J6.3 U2.3
LORA_D17: J6.2 U2.2
LORA_D18: J8.7 U3.7
LORA_D19: J8.6 U3.6
LORA_D20: J8.5 U3.5
LORA_D21: J8.4 U3.4
LORA_D22: J8.3 U3.3
LORA_D23: J8.2 U3.2
LORA_D24: J10.7 U5.7
LORA_D25: J10.6 U5.6
LORA_D26: J10.5 U5.5
LORA_D27: J10.4 U5.4
LORA_D28: J10.3 U5.3
LORA_D29: J10.2 U5.2
LORA_D30: J12.7 U6.7
LORA_D31: J12.6 U6.6
LORA_D32: J12.5 U6.5
LORA_D33: J12.4 U6.4
LORA_D34: J12.3 U6.3
LORA_D35: J12.2 U6.2
LORA_D36: J14.7 U7.7
LORA_D37: J14.6 U7.6
LORA_D38: J14.5 U7.5
LORA_D39: J14.4 U7.4
LORA_D40: J14.3 U7.3
LORA_D41: J14.2 U7.2
LORA_D42: J16.7 U8.7
LORA_D43: J16.6 U8.6
LORA_D44: J16.5 U8.5
LORA_D45: J16.4 U8.4
LORA_D46: J16.3 U8.3
LORA_D47: J16.2 U8.2
LORA_D48: J18.7 U9.7
LORA_D49: J18.6 U9.6
LORA_D50: J18.5 U9.5
LORA_D51: J18.4 U9.4
LORA_D52: J18.3 U9.3
LORA_D53: J18.2 U9.2
LORA_RF: E1.SIG U4.19
LORA_RF1: E2.SIG U1.19
LORA_RF2: E3.SIG U2.19
LORA_RF3: E4.SIG U3.19
LORA_RF4: E5.SIG U5.19
LORA_RF5: E6.SIG U6.19
LORA_RF6: E7.SIG U7.19
LORA_RF7: E8.SIG U8.19
LORA_RF8: E9.SIG U9.19
LORA_RXEN: J1.1 R18.2 U4.17
LORA_RXEN1: J3.1 R4.2 U1.17
LORA_RXEN2: J5.1 R9.2 U2.17
LORA_RXEN3: J7.1 R14.2 U3.17
LORA_RXEN4: J9.1 R23.2 U5.17
LORA_RXEN5: J11.1 R28.2 U6.17
LORA_RXEN6: J13.1 R33.2 U7.17
LORA_RXEN7: J15.1 R38.2 U8.17
LORA_RXEN8: J17.1 R43.2 U9.17
LORA_SCK: J1.6 U4.12
LORA_SCK1: J3.6 U1.12
LORA_SCK2: J5.6 U2.12
LORA_SCK3: J7.6 U3.12
LORA_SCK4: J9.6 U5.12
LORA_SCK5: J11.6 U6.12
LORA_SCK6: J13.6 U7.12
LORA_SCK7: J15.6 U8.12
LORA_SCK8: J17.6 U9.12
LORA_TXEN: J1.2 R19.2 U4.16
LORA_TXEN1: J3.2 R5.2 U1.16
LORA_TXEN2: J5.2 R10.2 U2.16
LORA_TXEN3: J7.2 R15.2 U3.16
LORA_TXEN4: J9.2 R24.2 U5.16
LORA_TXEN5: J11.2 R29.2 U6.16
LORA_TXEN6: J13.2 R34.2 U7.16
LORA_TXEN7: J15.2 R39.2 U8.16
LORA_TXEN8: J17.2 R44.2 U9.16
N$1: R6.2 VIN_LED1.1
N$2: D1.A R6.1
N$3: R11.2 VIN_LED2.1
N$4: D2.A R11.1
N$5: R20.2 VIN_LED3.1
N$6: D3.A R20.1
N$7: R25.2 VIN_LED4.1
N$8: R1.2 VIN_LED.1
N$9: D7.A R1.1
N$10: D4.A R25.1
N$11: R30.2 VIN_LED5.1
N$12: D5.A R30.1
N$13: R35.2 VIN_LED6.1
N$14: D6.A R35.1
N$15: R40.2 VIN_LED7.1
N$16: D8.A R40.1
N$17: R45.2 VIN_LED8.1
N$18: D9.A R45.1